# EAGLE board PinguinoBase (EAGLE 6.1)
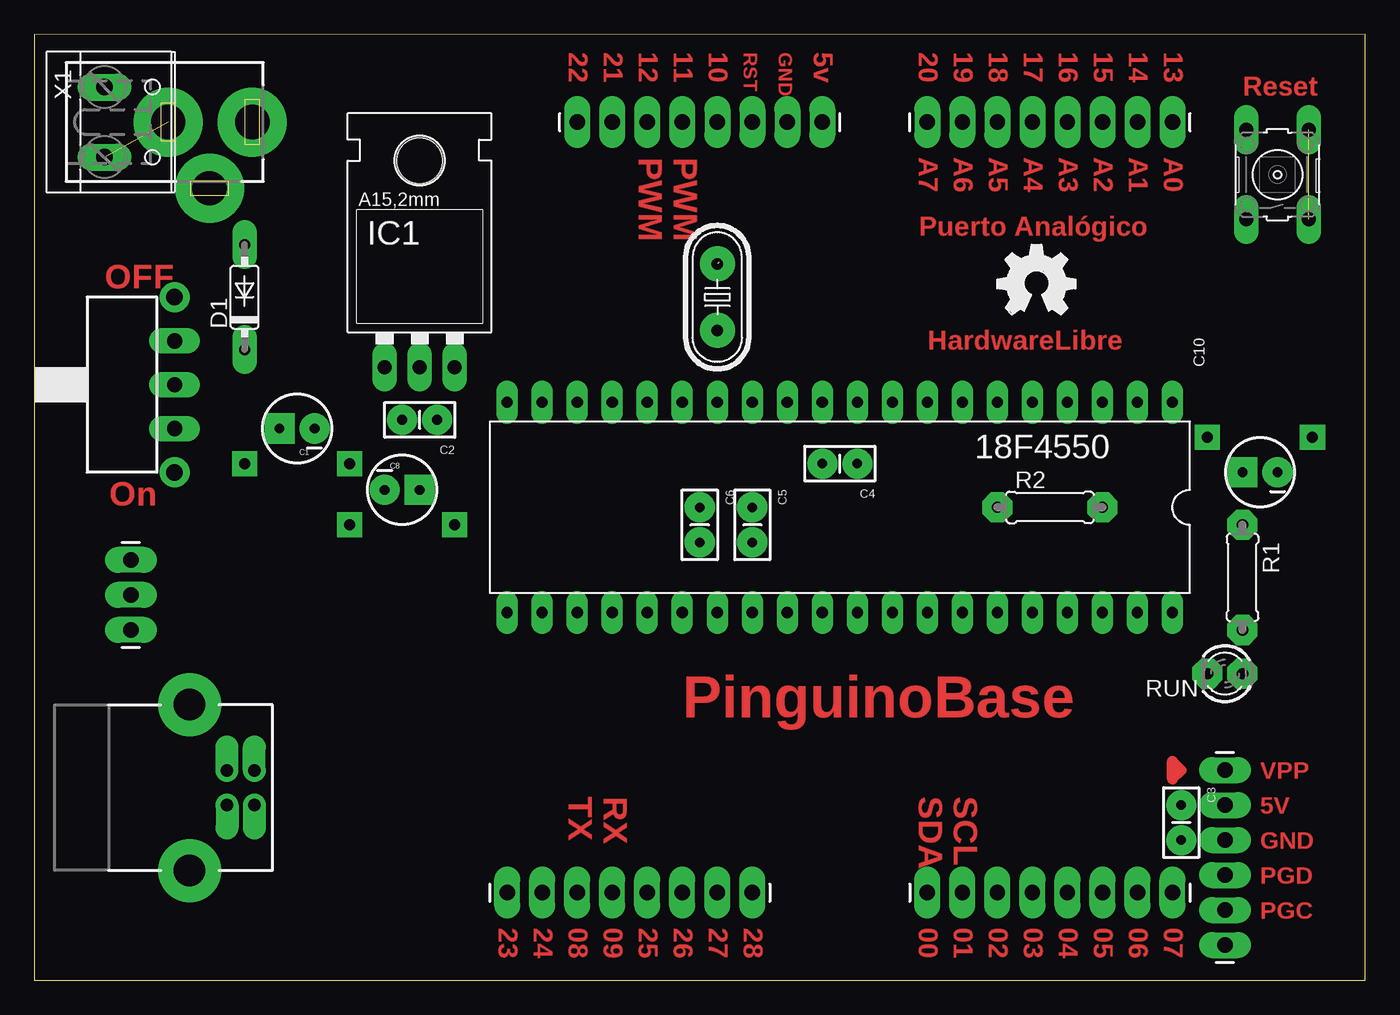
[diagram p0: board, top side]
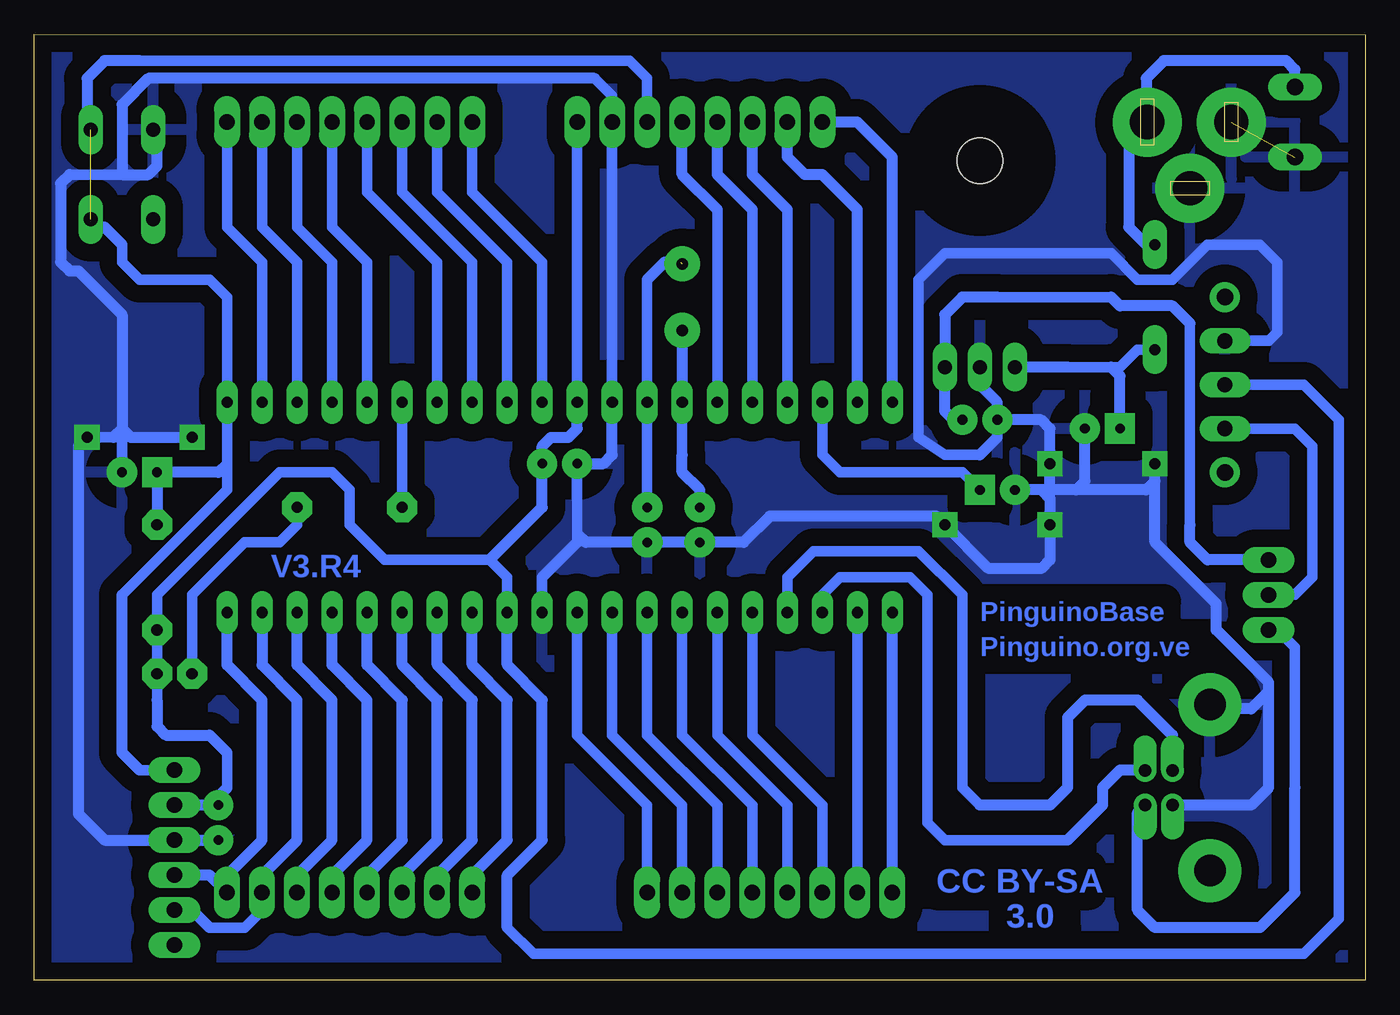
[diagram p1: board, bottom side, seen from below]

Size 96.52 x 68.58 mm. Coordinates in mm from the lower left corner, seen from the top.
Outline: 0,0 96.52,0 96.52,68.58 0,68.57 0,0
Copper layers (1*16): Top 0.035mm / dielectric 1.5mm / Bottom 0.035mm
Design rules: minimum track width 10mil, minimum drill 24mil, track to track 8mil, track to pad 8mil, pad to pad 8mil, via to via 8mil, smd to smd 8mil, copper to edge 40mil, drill to drill 8mil, minimum pad ring 15mil, minimum via ring 20mil, stop-mask expansion 4mil, vias tented up to drill 0mil, thermal gap 60mil

## Footprints (pad centres in the part's own frame; a part is rotated, then mirrored left to right if it is on the bottom)
DIL40 = drill 0.813 long: 1 -24.13,-7.62; 2 -21.59,-7.62; 3 -19.05,-7.62; 4 -16.51,-7.62; 5 -13.97,-7.62; 6 -11.43,-7.62; 7 -8.89,-7.62; 8 -6.35,-7.62; 9 -3.81,-7.62; 10 -1.27,-7.62; 11 1.27,-7.62; 12 3.81,-7.62; 13 6.35,-7.62; 14 8.89,-7.62; 15 11.43,-7.62; 16 13.97,-7.62; 17 16.51,-7.62; 18 19.05,-7.62; 19 21.59,-7.62; 20 24.13,-7.62; 21 24.13,7.62; 22 21.59,7.62; 23 19.05,7.62; 24 16.51,7.62; 25 13.97,7.62; 26 11.43,7.62; 27 8.89,7.62; 28 6.35,7.62; 29 3.81,7.62; 30 1.27,7.62; 31 -1.27,7.62; 32 -3.81,7.62; 33 -6.35,7.62; 34 -8.89,7.62; 35 -11.43,7.62; 36 -13.97,7.62; 37 -16.51,7.62; 38 -19.05,7.62; 39 -21.59,7.62; 40 -24.13,7.62
CPOL-RADIAL-10UF-25V = drill 0.7 pad 2.184 square: 1 1.27,0 | drill 0.7 pad 2.184: 2 -1.27,0
CAP-PTH-SMALL2 = drill 0.7 pad 2.184: 1 0,0; 2 2.54,0
DO35-7 = drill 0.813 pad 1.778 long: A 3.81,0; C -3.81,0
DCJ0303 = drill 2.5 pad 5: 1 0,3.1; 2 4.8,0; 3 0,-3
78XXL = drill 1.016 long: GND 0,-3.81; IN -2.54,-3.81; OUT 2.54,-3.81 | hole 3.302: 0,11.176
1X03_LONGPADS = drill 1.118 pad 1.88 long: 1 0,0; 2 2.54,0; 3 5.08,0
1X06_LONGPADS = drill 1.118 pad 1.88 long: 1 0,0; 2 2.54,0; 3 5.08,0; 4 7.62,0; 5 10.16,0; 6 12.7,0
1X08_LONGPADS = drill 1.118 pad 1.88 long: 1 0,0; 2 2.54,0; 3 5.08,0; 4 7.62,0; 5 10.16,0; 6 12.7,0; 7 15.24,0; 8 17.78,0
HC49U-V = drill 0.813 pad 2.54: 1 -2.413,0; 2 2.413,0
0207/7 = drill 0.813 pad 2.184 octagon: 1 -3.81,0; 2 3.81,0
B3F-10XX = drill 1.016 long: 1 -3.251,2.261; 2 3.251,2.261; 3 -3.251,-2.261; 4 3.251,-2.261
LED3MM = drill 0.813 pad 2.184 octagon: A -1.27,0; K 1.27,0
TL3XYO = drill 1.1 pad 1.422 long: 1 -3.175,-3.81; 2 0,-3.81; 3 3.175,-3.81 | drill 1.2 pad 2.184: M1 -6.35,-3.81; M2 6.35,-3.81
USB-B-PTH = drill 0.914 pad 1.676 offset: D+ 0,1.25; D- 1.981,1.25; GND 0,-1.25; VBUS 1.981,-1.25 | drill 2.286 pad 4.572: S1 -2.718,-6.02; S2 -2.718,6.02
W237-132 = drill 1.194 long: 1 -2.54,-0.635; 2 2.54,-0.635

## Placement (x,y rotation side)
18F4550  [DIL40]  58.42,34.29 180 top
C1  0.33uf/50v  [CPOL-RADIAL-10UF-25V]  19.05,40.01 180 top
C2  0.1uf  [CAP-PTH-SMALL2]  29.21,40.64 180 top
C3  0.1uf  [CAP-PTH-SMALL2]  83.19,12.7 270 top
C4  0.1uf  [CAP-PTH-SMALL2]  59.69,37.47 180 top
C5  22pf  [CAP-PTH-SMALL2]  52.07,34.29 270 top
C6  22pf  [CAP-PTH-SMALL2]  48.26,34.29 270 top
C8  0.22uf/50v  [CPOL-RADIAL-10UF-25V]  26.67,35.56 0 top
C10  10uf/50v  [CPOL-RADIAL-10UF-25V]  88.9,36.83 180 top
D1  4007  [DO35-7]  15.24,49.53 90 top
DC-IN  [DCJ0303]  12.7,62.23 270 top
IC1  7805  [78XXL]  27.94,48.26 0 top
JP1  [1X03_LONGPADS]  6.99,25.4 90 top
JP2  [1X06_LONGPADS]  86.36,15.24 270 top
JP3  [1X08_LONGPADS]  82.55,62.23 180 top
JP4  [1X08_LONGPADS]  57.15,62.23 180 top
JP5  [1X08_LONGPADS]  64.77,6.35 0 top
JP6  [1X08_LONGPADS]  34.29,6.35 0 top
LOGO1  OSHW_LOGO_FILLX0200-NT  [OSHW_FILLX200_NOTEXT]  69.85,48.26 0 top
Q1  20MHz  [HC49U-V]  49.53,49.53 270 top
R1  10k  [0207/7]  87.63,29.21 270 top
R2  470  [0207/7]  73.66,34.29 0 top
RESET  [B3F-10XX]  90.17,58.42 90 top
RUN  green  [LED3MM]  86.36,22.23 180 top
S1  [TL3XYO]  6.35,43.18 90 top
U$1  USB+SHIELD  [USB-B-PTH]  13.97,13.97 0 top
X1  [W237-132]  5.71,62.23 270 top

## Library data of the parts
18F4550 = microchip; MF: MICROCHIP; MPN: PIC18F4550-I/P; OC_FARNELL: 9321357; OC_NEWARK: 74K8623
C1-C6 C8 C10 JP1-JP6 U$1 = SparkFun
D1 = diode
DC-IN = jack; OC_FARNELL: unknown; OC_NEWARK: unknown
IC1 = v-reg
LOGO1 = OSHW
Q1 = crystal; OC_FARNELL: 1666969; OC_NEWARK: unknown
R1 R2 = resistor
RESET = switch-omron; MPN: B3F-1000; OC_FARNELL: 176432; OC_NEWARK: 36M3542
RUN = led
S1 = aasanchez
X1 = con-wago-508; OC_FARNELL: unknown; OC_NEWARK: unknown

## Nets
+5V: 18F4550.11 18F4550.32 C3.1 C4.1 JP2.2 JP4.1 R1.2 RUN.A S1.2
D+: 18F4550.24 U$1.D+
D-: 18F4550.23 U$1.D-
GND: 18F4550.12 18F4550.31 C1.2 C2.2 C3.2 C4.2 C5.2 C6.2 C8.2 C10.2 DC-IN.2 DC-IN.3 IC1.GND JP2.3 JP4.2 RESET.2 S1.3 U$1.GND U$1.S2 X1.2
N$1: 18F4550.13 C5.1 Q1.1
N$2: C1.1 D1.C IC1.IN
N$3: C2.1 IC1.OUT JP1.3
N$4: JP1.1 U$1.VBUS
N$5: 18F4550.14 C6.1 Q1.2
N$6: 18F4550.18 C8.1
N$7: R2.2 RUN.K
N$8: 18F4550.6 R2.1
N$10: JP1.2 S1.1
N$11: D1.A DC-IN.1 X1.1
PIN0: 18F4550.33 JP5.1
PIN1: 18F4550.34 JP5.2
PIN2: 18F4550.35 JP5.3
PIN3: 18F4550.36 JP5.4
PIN4: 18F4550.37 JP5.5
PIN5: 18F4550.38 JP5.6
PIN6: 18F4550.39 JP2.5 JP5.7
PIN7: 18F4550.40 JP2.4 JP5.8
PIN8: 18F4550.25 JP6.3
PIN9: 18F4550.26 JP6.4
PIN10: 18F4550.15 JP4.4
PIN11: 18F4550.16 JP4.5
PIN12: 18F4550.17 JP4.6
PIN13: 18F4550.2 JP3.1
PIN14: 18F4550.3 JP3.2
PIN15: 18F4550.4 JP3.3
PIN16: 18F4550.5 JP3.4
PIN17: 18F4550.7 JP3.5
PIN18: 18F4550.8 JP3.6
PIN19: 18F4550.9 JP3.7
PIN20: 18F4550.10 JP3.8
PIN21: 18F4550.19 JP4.7
PIN22: 18F4550.20 JP4.8
PIN23: 18F4550.21 JP6.1
PIN24: 18F4550.22 JP6.2
PIN25: 18F4550.27 JP6.5
PIN26: 18F4550.28 JP6.6
PIN27: 18F4550.29 JP6.7
PIN28: 18F4550.30 JP6.8
RESET: 18F4550.1 C10.1 JP2.1 JP4.3 R1.1 RESET.3 RESET.4

## Tracks (layer width: path | path; a pad name or v marks a point on that pad's centre or on a via)
+5V
  Bottom 0.762: 18F4550.32 62.23,29.21 63.5,30.48 71.12,30.48 73.66,33.02 73.66,35.56 74.93,36.83 78.74,36.83 87.63,27.94 R1.2 RUN.A 87.63,20.32 | 82.55,16.51 82.55,13.97 | 18F4550.11 JP4.1 | S1.2 4.45,43.18 1.91,40.64 1.91,4.45 4.45,1.91 60.33,1.91 62.23,3.81
  Bottom 0.813: 62.23,3.81 62.23,7.62 59.69,10.16 59.69,20.32 62.23,22.86 18F4550.32 | 83.82,12.7 JP2.2 | 82.55,13.97 83.82,12.7 | 82.55,16.51 83.82,17.78 87,17.78 87.63,18.41 87.63,20.32 | 18F4550.11 57.15,40.01 57.78,39.37 59.05,39.37 59.69,38.73 C4.1 59.69,34.29 63.5,30.48 | 83.82,12.7 C3.1
D+
  Bottom 0.762: 18F4550.24 41.91,29.21 40.01,31.11 32.38,31.11 29.21,27.94 29.21,13.97 27.94,12.7
  Bottom 0.813: 27.94,12.7 22.86,12.7 21.59,13.97 21.59,19.05 20.32,20.32 16.51,20.32 13.97,17.78 U$1.D+
D-
  Bottom 0.762: 18F4550.23 39.37,27.94 38.1,29.21 33.02,29.21 31.75,27.94 31.75,11.43 30.48,10.16 21.59,10.16
  Bottom 0.813: 21.59,10.16 19.05,12.7 19.05,13.97 17.78,15.24 15.97,15.24 U$1.D-
GND  (via drill 0.8)  (1 unrouted)
  Bottom 0.762: 59.69,29.21 18F4550.31 | 55.88,65.41 54.61,64.14 JP4.2 18F4550.12 | 57.15,31.75 57.15,32.38 C4.2 | 90.17,58.42 93.98,58.42 | S1.3 6.99,46.35 6.35,46.99 6.35,52.07 7.62,53.34 11.43,53.34 13.97,50.8 16.51,50.8 18.41,52.7 30.48,52.7 32.38,50.8 32.38,39.37 30.48,38.1 27.94,38.1 | C2.2 26.67,39.37 | C10.2 90.17,39.37 90.81,39.37 v92.71,39.37
  Bottom 0.813: 57.15,31.75 59.69,29.21 | 22.86,34.92 v22.86,33.02 22.86,30.48 23.5,29.84 27.3,29.84 v30.48,33.02 31.11,33.66 43.18,33.66 45.09,31.75 C6.2 C5.2 56.52,31.75 57.15,32.38 | 22.86,34.92 v22.86,37.47 22.86,40.01 23.5,40.64 C2.2 26.67,41.91 27.94,43.18 IC1.GND | 55.88,65.41 88.27,65.41 90.17,63.5 90.17,58.42 88.27,58.42 87.63,59.05 87.63,61.59 RESET.2 | 15.24,36.2 v15.24,37.47 | 23.5,35.56 C8.2 | 23.5,35.56 22.86,34.92 | 15.24,36.2 15.88,35.56 20.95,35.56 | 20.95,35.56 23.5,35.56 | C1.2 20.32,36.2 20.95,35.56 | 26.67,39.37 27.94,38.1 | 15.24,36.2 15.24,31.75 10.79,27.3 10.79,25.4 6.99,21.59 6.99,20.95 | 18F4550.12 54.61,38.1 55.24,37.47 C4.2 | 93.98,58.42 94.61,57.78 94.61,52.07 93.98,51.44 93.34,51.44 90.17,48.26 90.17,40.01 | 90.17,40.01 90.81,39.37 | v85.09,39.37 89.53,39.37 90.17,40.01 | 6.99,20.95 8.26,19.68 10.79,19.68 U$1.S2 | 6.99,20.95 6.99,13.97 8.26,12.7 13.95,12.7 U$1.GND | C3.2 JP2.3 91.44,10.16 93.34,12.06 93.34,38.73 v92.71,39.37
  pour Bottom (isolate 1.27): 0,0 96.52,0 96.52,68.58 0,68.58
N$1  (1 unrouted)
  Bottom 0.762: 52.07,50.8 18F4550.13 C5.1
  Bottom 0.813: 52.07,50.8 50.8,52.07 49.66,52.07
N$2
  Bottom 0.762: D1.C 16.51,45.72 17.78,44.45 18.41,44.45 21.59,44.45 | C1.1 17.78,40.64
  Bottom 0.813: 21.59,44.45 IC1.IN | 17.78,40.64 17.78,43.81 18.41,44.45
N$3
  Bottom 0.762: 12.7,33.02 12.7,47.62 | 18.41,49.53 26.67,49.53
  Bottom 0.813: 26.67,49.53 29.21,49.53 30.48,48.26 IC1.OUT 30.48,41.27 29.84,40.64 C2.1 | 18.41,49.53 17.78,48.9 13.97,48.9 12.7,47.62 | 12.7,33.02 12.7,31.75 11.43,30.48 JP1.3
N$4
  Bottom 0.762: JP1.1 6.35,25.4 5.08,24.13 5.08,13.97
  Bottom 0.813: 5.08,13.97 5.08,6.35 7.62,3.81 15.24,3.81 16.51,5.08 16.51,12.16 U$1.VBUS
N$5
  Bottom 0.762: 49.53,38.1 18F4550.14
  Bottom 0.813: C6.1 48.26,35.56 49.53,36.83 49.53,38.1 | Q1.2 18F4550.14
N$6
  Bottom 0.762: 18F4550.18 39.37,38.1 38.1,36.83 29.21,36.83 C8.1
N$7
  Bottom 0.762: RUN.K 85.09,27.94 81.28,31.75 78.74,31.75 77.47,33.02 R2.2
N$8
  Bottom 0.762: R2.1 18F4550.6
N$9
  Top 0.762: 82.55,15.24 82.55,14.61 83.19,15.24 | 83.19,15.24 82.55,15.88 82.55,15.24 | 83.19,15.24 82.55,15.24
  Top 0.813: 82.55,14.61 82.55,15.88
N$10
  Bottom 0.762: JP1.2 5.08,27.94 3.81,29.21 3.81,38.73 5.08,40.01 S1.1
N$11
  Bottom 0.813: X1.1 5.08,66.04 5.71,66.67 14.61,66.67 15.88,65.41 15.88,62.23 | DC-IN.1 15.88,62.23 | 15.88,62.23 17.14,60.96 17.14,54.61 15.88,53.34 D1.A
PIN0
  Bottom 0.813: JP5.1 64.77,7.62 62.23,10.16 62.23,20.32 64.77,22.86 18F4550.33
PIN1
  Bottom 0.813: JP5.2 67.31,7.62 64.77,10.16 64.77,20.32 67.31,22.86 18F4550.34
PIN2
  Bottom 0.813: JP5.3 69.85,7.62 67.31,10.16 67.31,20.32 69.85,22.86 18F4550.35
PIN3
  Bottom 0.813: JP5.4 72.39,7.62 69.85,10.16 69.85,20.32 72.39,22.86 18F4550.36
PIN4
  Bottom 0.813: JP5.5 74.93,7.62 72.39,10.16 72.39,20.32 74.93,22.86 18F4550.37
PIN5
  Bottom 0.813: JP5.6 77.47,7.62 74.93,10.16 74.93,20.32 77.47,22.86 18F4550.38
PIN6
  Bottom 0.762: 83.82,3.81 81.28,3.81 80.01,5.08 JP5.7
  Bottom 0.813: JP5.7 80.01,7.62 77.47,10.16 77.47,20.32 80.01,22.86 18F4550.39 | 83.82,3.81 85.09,5.08 JP2.5
PIN7
  Bottom 0.813: 18F4550.40 82.55,22.86 80.01,20.32 80.01,10.16 82.55,7.62 JP5.8 83.82,7.62 JP2.4
PIN8
  Bottom 0.762: 18F4550.25 44.45,17.78 39.37,12.7 JP6.3
PIN9
  Bottom 0.762: 18F4550.26 46.99,17.78 41.91,12.7 JP6.4
PIN10
  Bottom 0.762: 18F4550.15 46.99,55.88
  Bottom 0.813: 46.99,55.88 49.53,58.42 JP4.4
PIN11
  Bottom 0.762: 18F4550.16 44.45,55.88
  Bottom 0.813: 44.45,55.88 46.99,58.42 JP4.5
PIN12
  Bottom 0.762: 18F4550.17 41.91,55.88
  Bottom 0.813: 41.91,55.88 44.45,58.42 JP4.6
PIN13
  Bottom 0.762: 18F4550.2 80.01,52.07 82.55,54.61 JP3.1
PIN14
  Bottom 0.762: 18F4550.3 77.47,52.07 80.01,54.61 JP3.2
PIN15
  Bottom 0.762: 18F4550.4 74.93,52.07 77.47,54.61 JP3.3
PIN16
  Bottom 0.762: 18F4550.5 72.39,52.07 74.93,54.61 JP3.4
PIN17
  Bottom 0.762: 18F4550.7 67.31,52.07 72.39,57.15 JP3.5
PIN18
  Bottom 0.762: 18F4550.8 64.77,52.07 69.85,57.15 JP3.6
PIN19
  Bottom 0.762: 18F4550.9 62.23,52.07 67.31,57.15 JP3.7
PIN20
  Bottom 0.762: 18F4550.10 59.69,52.07 64.77,57.15 JP3.8
PIN21
  Bottom 0.813: 18F4550.19 36.83,55.88 39.37,58.42 40.64,58.42 41.91,59.69 JP4.7
PIN22
  Bottom 0.813: 18F4550.20 34.29,59.69 36.83,62.23 JP4.8
PIN23
  Bottom 0.813: JP6.1 18F4550.21
PIN24
  Bottom 0.762: JP6.2 18F4550.22
PIN25
  Bottom 0.762: 18F4550.27 49.53,17.78 44.45,12.7 JP6.5
PIN26
  Bottom 0.762: 18F4550.28 52.07,17.78 46.99,12.7 JP6.6
PIN27
  Bottom 0.762: 18F4550.29 54.61,17.78 49.53,12.7 JP6.7
PIN28
  Bottom 0.762: 18F4550.30 57.15,17.78 52.07,12.7 JP6.8
RESET  (1 unrouted)
  Bottom 0.762: JP2.1 88.9,15.24 | 82.55,37.47 82.55,35.56 90.17,27.94 | 82.55,37.47 18F4550.1 82.55,49.53 83.82,50.8 88.9,50.8 90.17,52.07 90.17,53.34 | 82.55,37.47 83.19,36.83 | JP4.3 52.07,65.41 53.34,66.67 88.9,66.67
  Bottom 0.813: 90.17,53.34 91.44,54.61 92.08,54.61 RESET.3 | 88.9,66.67 91.44,66.67 92.71,65.41 92.71,62.23 RESET.4 | 90.17,27.94 90.17,16.51 88.9,15.24 | 83.19,36.83 C10.1 R1.1

## Text on the board
Top: 22 | 21 | 12 | 11 | 10 | RST | GND | 5v | 20 | 19 | 18 | 17 | 16 | 15 | 14 | 13 | Reset | PWM | PWM | A7 | A6 | A5 | A4 | A3 | A2 | A1 | A0 | Puerto Analógico | OFF | HardwareLibre | On | PinguinoBase | VPP | TX | RX | SDA | SCL | 5V | GND | PGD | 23 | 24 | 08 | 09 | 25 | 26 | 27 | 28 | 00 | 01 | 02 | 03 | 04 | 05 | 06 | 07 | PGC
Bottom: V3.R4 | PinguinoBase | Pinguino.org.ve | CC BY-SA | 3.0